# EAGLE board rele_II (EAGLE 4.01)
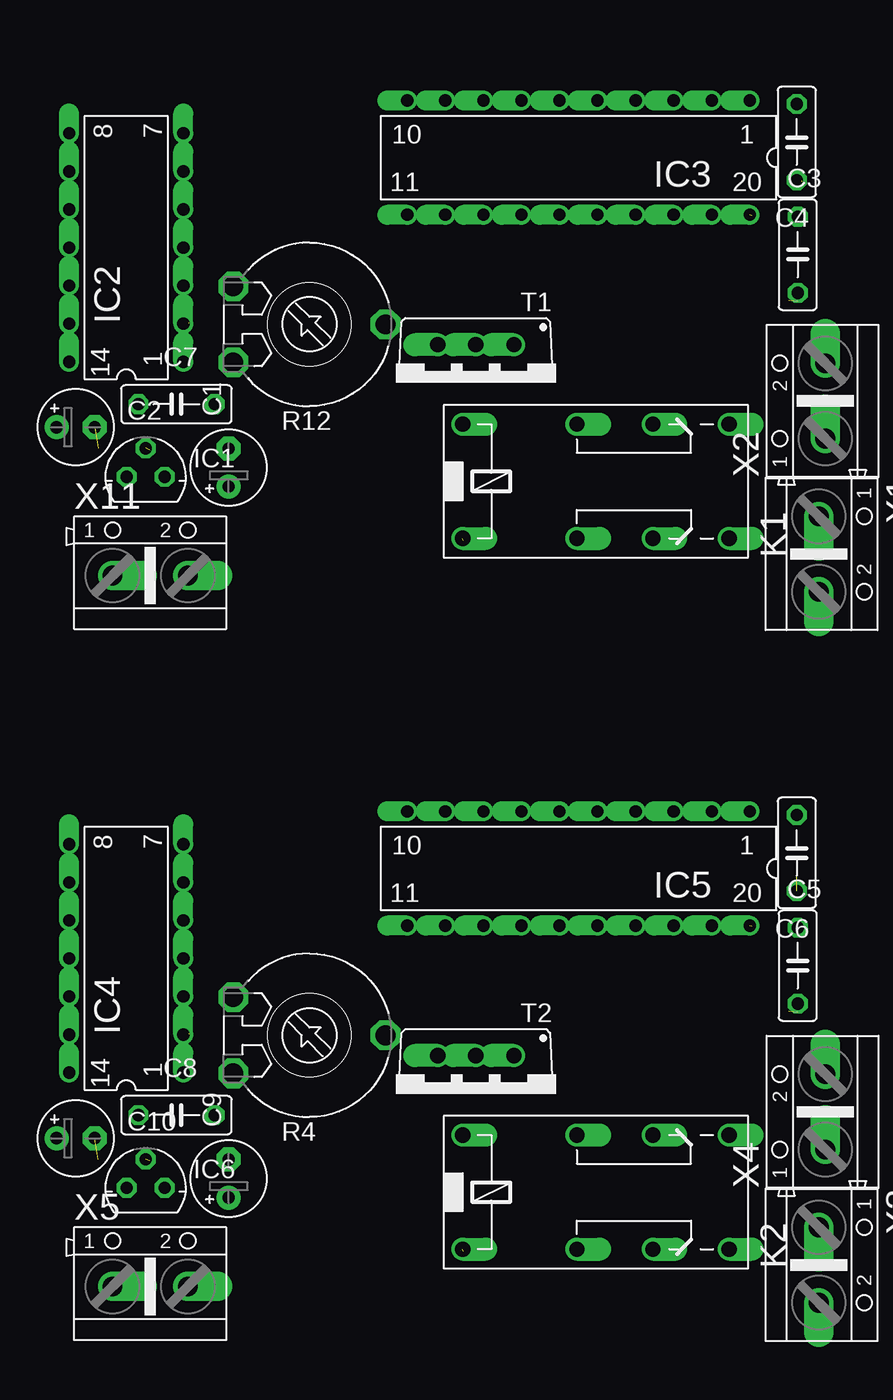
[diagram p0: board, top side]
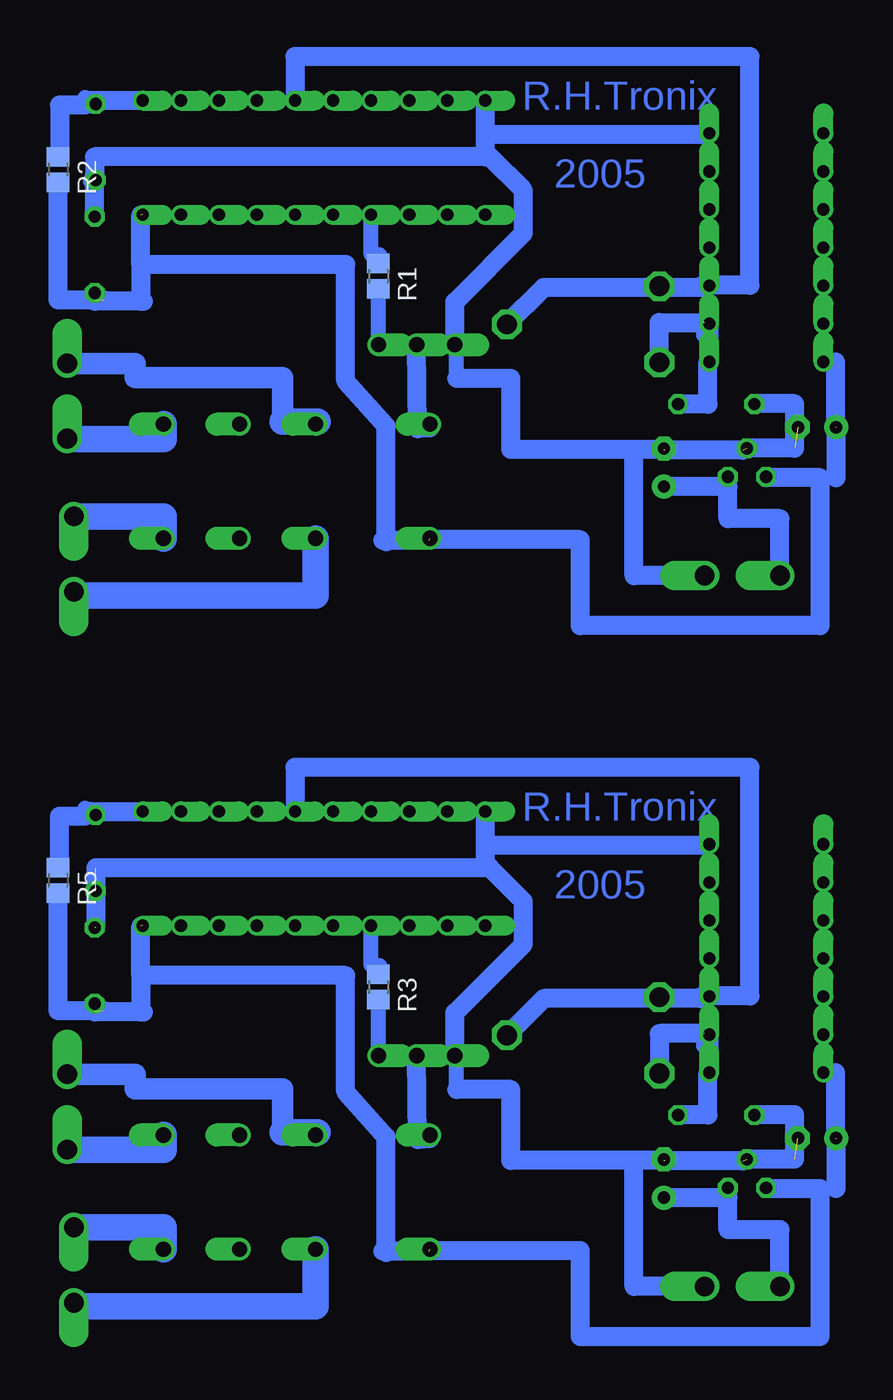
[diagram p1: board, bottom side, seen from below]

No outline drawn. Coordinates in mm, seen from the top.
Copper layers used: Bottom

## Footprints (pad centres in the part's own frame; a part is rotated, then mirrored left to right if it is on the bottom)
E2,5-5 = drill 0.813 pad 1.6 round: + -1.27,0 | drill 0.813 pad 1.6 octagon: - 1.27,0
C050-025X075 = drill 0.813 octagon: 1 -2.54,0; 2 2.54,0
78LXX = drill 0.813 octagon: GND 0,1.905; IN 1.27,0; OUT -1.27,0
DIL14 = drill 0.813 offset: 1 -7.62,-3.81; 2 -5.08,-3.81; 3 -2.54,-3.81; 4 0,-3.81; 5 2.54,-3.81; 6 5.08,-3.81; 7 7.62,-3.81; 8 7.62,3.81; 9 5.08,3.81; 10 2.54,3.81; 11 0,3.81; 12 -2.54,3.81; 13 -5.08,3.81; 14 -7.62,3.81
DIL20 = drill 0.813 offset: 1 -11.43,-3.81; 2 -8.89,-3.81; 3 -6.35,-3.81; 4 -3.81,-3.81; 5 -1.27,-3.81; 6 1.27,-3.81; 7 3.81,-3.81; 8 6.35,-3.81; 9 8.89,-3.81; 10 11.43,-3.81; 11 11.43,3.81; 12 8.89,3.81; 13 6.35,3.81; 14 3.81,3.81; 15 1.27,3.81; 16 -1.27,3.81; 17 -3.81,3.81; 18 -6.35,3.81; 19 -8.89,3.81; 20 -11.43,3.81
351 = drill 1.016 offset: 1 -3.81,-3.81; 16 -3.81,3.81; O1 8.89,-3.81; O2 8.89,3.81; P1 3.81,-3.81; P2 3.81,3.81; S1 13.97,-3.81; S2 13.97,3.81
R0805 = smd 1.3 x 1.5: 1 -0.85,0; 2 0.85,0
LI10 = drill 1.321 octagon: 1 -2.54,-5.08; 2 0,5.08; 3 2.54,-5.08
TO220V = drill 1.016 offset: 1 -2.54,-2.54; 2 0,-2.54; 3 2.54,-2.54
AK500/2 = drill 1.321 offset: 1 -2.515,0; 2 2.515,0

## Placement (x,y rotation side)
C1  [E2,5-5]  55.45,38.93 90 top
C2  [E2,5-5]  45.23,41.63 0 top
C3  100n  [C050-025X075]  93.42,53.14 90 top
C4  100n  [C050-025X075]  93.35,60.66 270 top
C5  100n  [C050-025X075]  93.42,5.71 90 top
C6  100n  [C050-025X075]  93.35,13.23 270 top
C7  1n  [C050-025X075]  51.96,43.17 0 top
C8  1n  [C050-025X075]  51.96,-4.26 0 top
C9  [E2,5-5]  55.45,-8.49 90 top
C10  [E2,5-5]  45.23,-5.8 0 top
IC1  [78LXX]  49.9,38.32 0 top
IC2  4093N  [DIL14]  48.61,53.62 90 top
IC3  AT90S1200P  [DIL20]  78.79,59.62 180 top
IC4  4093N  [DIL14]  48.61,6.19 90 top
IC5  AT90S1200P  [DIL20]  78.79,12.19 180 top
IC6  [78LXX]  49.9,-9.11 0 top
K1  351  [351]  74.87,38.02 0 top
K2  351  [351]  74.87,-9.4 0 top
R1  270R  [R0805]  74.49,51.71 270 bottom
R2  10k  [R0805]  95.87,58.83 270 bottom
R3  270R  [R0805]  74.49,4.28 270 bottom
R4  1M  [LI10]  60.83,1.07 270 top
R5  10k  [R0805]  95.87,11.4 270 bottom
R12  1M  [LI10]  60.83,48.5 270 top
T1  TIP122*  [TO220V]  71.94,44.6 180 top
T2  TIP122*  [TO220V]  71.94,-2.83 180 top
X1  [AK500/2]  94.82,33.17 270 top
X2  [AK500/2]  95.27,43.38 90 top
X3  [AK500/2]  94.82,-14.26 270 top
X4  [AK500/2]  95.27,-4.04 90 top
X5  [AK500/2]  50.21,-15.69 0 top
X11  [AK500/2]  50.21,31.73 0 top

## Library data of the parts
C1-C10 R1-R3 R5 = rcl
IC1 IC6 = v-reg
IC2 IC4 = 40xx
IC3 IC5 = atmel
K1 K2 = relay
R4 R12 = pot
T1 T2 = transistor-npn
X1-X5 X11 = con-ptr500

## Nets
GND: C1.- C2.- C3.2 C4.2 C7.1 IC1.GND IC2.7 IC3.10 T1.3 X11.2
GND1: C5.2 C6.2 C8.1 C9.- C10.- IC4.7 IC5.10 IC6.GND T2.3 X5.2
N$1: C2.+ C3.1 IC1.OUT IC2.14 IC3.20 K1.1 R2.2
N$2: C1.+ IC1.IN X11.1
N$3: C6.1 IC5.1 R5.1
N$4: R1.2 T1.1
N$5: K1.S2 X2.1
N$6: K1.P2 X2.2
N$7: K1.S1 X1.1
N$8: K1.P1 X1.2
N$9: K1.16 T1.2
N$10: C8.2 IC4.1 IC4.2 R4.3
N$11: IC4.3 IC5.5 R4.1 R4.2
N$12: IC5.14 R3.1
N$13: C5.1 C10.+ IC4.14 IC5.20 IC6.OUT K2.1 R5.2
N$14: R3.2 T2.1
N$15: K2.S2 X4.1
N$16: K2.P2 X4.2
N$17: K2.S1 X3.1
N$18: K2.P1 X3.2
N$19: K2.16 T2.2
N$20: C9.+ IC6.IN X5.1
N$40: C4.1 IC3.1 R2.1
N$41: C7.2 IC2.1 IC2.2 R12.3
N$42: IC2.3 IC3.5 R12.1 R12.2
N$47: IC3.14 R1.1

## Tracks (layer width: path | path; a pad name or v marks a point on that pad's centre or on a via)
GND  (4 unrouted)
  Bottom 0.406: 49.46,43.2 49.42,43.2 C7.1 | C1.- 55.45,40.1 55.45,40.15 | 57.44,39.97 55.38,39.97 55.38,40.15 | 67.31,61.2 67.27,61.2 67.27,61.24 | 52.42,61.2 IC2.7
  Bottom 1.016: 93.71,58.12 93.71,58.02 | 93.71,58.12 C4.2 | 93.42,58.6 93.71,58.12 | 93.42,58.03 93.68,58.03 | 67.27,59.67 67.27,59.64 | 67.27,59.67 67.36,59.67 67.11,59.67 67.08,59.69 | 67.27,59.67 67.27,61.24 | T1.3 69.28,47.14 69.28,44.88
  Bottom 1.27: C3.2 93.42,58.6 | IC3.10 67.36,59.67 93.44,59.67 93.42,58.03 | 69.28,44.88 65.66,44.88 65.66,40.15 55.45,40.15 | T1.3 69.4,49.99 64.82,54.57 64.82,57.43 67.08,59.69 | IC1.GND 46.73,40.23 46.73,43.2 49.42,43.2 | 50.18,40.1 55.45,40.1 | X11.2 57.44,31.73 57.44,39.97 | 67.27,61.2 52.42,61.2
GND1  (5 unrouted)
  Bottom 0.406: 49.46,-4.23 49.42,-4.23 C8.1 | C9.- 55.45,-7.33 55.45,-7.28 | 57.44,-7.46 55.38,-7.46 55.38,-7.28 | 67.31,13.77 67.27,13.77 67.27,13.81 | 52.42,13.77 IC4.7
  Bottom 1.016: 67.27,12.24 67.27,12.21 | 67.27,12.24 67.36,12.24 67.11,12.24 67.08,12.27 | 67.27,12.24 67.27,13.81 | T2.3 69.28,-0.29 69.28,-2.55
  Bottom 1.27: IC5.10 67.36,12.24 93.35,12.24 93.35,8.3 | 69.28,-2.55 65.66,-2.55 65.66,-7.28 55.45,-7.28 | T2.3 69.4,2.56 64.82,7.14 64.82,10.01 67.08,12.27 | IC6.GND 46.73,-7.2 46.73,-4.23 49.42,-4.23 | 50.18,-7.33 55.45,-7.33 | X5.2 57.44,-15.69 57.44,-7.46 | 67.27,13.77 52.42,13.77
N$1  (4 unrouted)
  Bottom 0.406: 48.63,38.26 48.65,38.26 | 48.63,38.26 IC1.OUT | 48.63,38.26 43.96,38.26 | 43.99,46 IC2.14 | 70.94,34.21 K1.1
  Bottom 1.016: 74.19,34.09 73.97,33.98
  Bottom 1.27: 90.36,52.48 90.36,55.78 | 90.36,52.48 76.68,52.48 76.68,44.72 73.97,41.69 73.97,33.98 | 71.11,34.09 74.19,34.09 | 43.96,38.26 C2.+ | 43.99,41.63 43.99,46 | 48.63,38.26 45.02,38.26 45.02,28.39 61.03,28.39 61.03,34.13 70.94,34.13 70.94,34.21 70.94,34.23 | 90.36,50.04 90.19,50.04 | 90.36,52.48 90.36,50.04 | C3.1 93.42,50.04 90.36,50.04 | R2.2 95.87,50.13 92.83,50.13
N$2
  Bottom 0.406: IC1.IN 51.17,37.66 51.17,38.13 51.12,38.13
  Bottom 1.27: 51.17,37.66 C1.+ | X11.1 47.7,35.53 51.17,35.53 51.17,38.13
N$3
  Bottom 1.016: 94.08,15.7 94.08,15.77 | 94.08,15.77 C6.1 93.76,15.77 | 94.08,15.77 94.08,16.21 | 93.76,15.77 93.76,15.64 | 93.76,15.77 93.76,16
  Bottom 1.27: 93.76,16 IC5.1 | R5.1 95.78,12.25 95.78,15.7 94.08,15.7
N$4
  Bottom 1.016: 74.48,47.18 T1.1 | 74.48,47.18 R1.2 | 74.48,47.18 74.54,47.18
N$5
  Bottom 1.016: 95.27,40.84 X2.1
  Bottom 1.778: K1.S2 88.84,40.84 95.27,40.84
N$6
  Bottom 1.016: K1.P2 78.55,41.83 78.55,42.01
  Bottom 1.422: 80.89,42.01 80.89,44.93 90.74,44.93 90.74,45.87 95.27,45.87 | 95.27,45.87 95.4,45.87 | 95.27,45.87 X2.2
  Bottom 1.778: 78.55,42.01 80.89,42.01
N$7
  Bottom 1.016: 94.93,35.68 X1.1
  Bottom 1.778: K1.S1 88.84,35.68 X1.1
N$8
  Bottom 1.016: 94.82,30.42 X1.2
  Bottom 1.778: K1.P1 78.68,30.42 94.82,30.42
N$9
  Bottom 1.016: K1.16 71.06,41.59
  Bottom 1.27: T1.2 71.89,41.53 71.06,41.59
N$10  (1 unrouted)
  Bottom 1.016: IC4.2 52.81,1.11 | IC4.1 52.51,-1.43 52.51,-1.34 | 52.81,1.11 52.81,1.17 | 52.81,1.11 52.81,0.34
  Bottom 1.27: IC4.1 IC4.2 | C8.2 52.51,-4.26 52.51,-1.43 | R4.3 55.75,1.19 52.76,1.19
N$11
  Bottom 1.016: 52.91,3.65 52.91,3.58 | 52.91,3.65 IC4.3 | 52.91,3.68 52.91,3.65 | 55.84,3.52 R4.1 55.77,3.59 55.77,3.52 | 52.91,3.65 53.04,3.52
  Bottom 1.27: IC5.5 80.06,18.94 49.7,18.94 49.7,3.68 52.91,3.68 | R4.2 63.46,3.52 55.84,3.52 | 53.04,3.52 55.77,3.52
N$12
  Bottom 1.016: 74.45,5.71 74.39,5.71 | R3.1 74.45,5.71 | IC5.14 74.98,5.71 74.45,5.71
N$13  (4 unrouted)
  Bottom 0.406: 48.63,-9.16 48.65,-9.16 | 48.63,-9.16 IC6.OUT | 48.63,-9.16 43.96,-9.16 | 43.99,-1.43 IC4.14 | 70.94,-13.21 K2.1
  Bottom 1.016: 74.19,-13.34 73.97,-13.45
  Bottom 1.27: 90.36,5.05 90.36,8.36 | 90.36,5.05 76.68,5.05 76.68,-2.7 73.97,-5.74 73.97,-13.45 | 71.11,-13.34 74.19,-13.34 | 43.96,-9.16 C10.+ | 43.99,-5.8 43.99,-1.43 | 48.63,-9.16 45.02,-9.16 45.02,-19.03 61.03,-19.03 61.03,-13.3 70.94,-13.3 70.94,-13.21 70.94,-13.2 | 90.36,2.61 90.19,2.61 | 90.36,5.05 90.36,2.61 | C5.1 93.42,2.61 90.36,2.61 | R5.2 95.87,2.7 92.83,2.7
N$14
  Bottom 1.016: 74.48,-0.24 T2.1 | 74.48,-0.24 R3.2 | 74.48,-0.24 74.54,-0.24
N$15
  Bottom 1.016: 95.27,-6.59 X4.1
  Bottom 1.778: K2.S2 88.84,-6.59 95.27,-6.59
N$16
  Bottom 1.016: K2.P2 78.55,-5.59 78.55,-5.42
  Bottom 1.422: 80.89,-5.42 80.89,-2.5 90.74,-2.5 90.74,-1.56 95.27,-1.56 | 95.27,-1.56 95.4,-1.56 | 95.27,-1.56 X4.2
  Bottom 1.778: 78.55,-5.42 80.89,-5.42
N$17
  Bottom 1.016: 94.93,-11.74 X3.1
  Bottom 1.778: K2.S1 88.84,-11.74 X3.1
N$18
  Bottom 1.016: 94.82,-17.01 X3.2
  Bottom 1.778: K2.P1 78.68,-17.01 94.82,-17.01
N$19
  Bottom 1.016: K2.16 71.06,-5.84
  Bottom 1.27: T2.2 71.89,-5.89 71.06,-5.84
N$20
  Bottom 0.406: IC6.IN 51.17,-9.76 51.17,-9.3 51.12,-9.3
  Bottom 1.27: 51.17,-9.76 C9.+ | X5.1 47.7,-11.9 51.17,-11.9 51.17,-9.3
N$40
  Bottom 1.016: 94.08,63.2 94.08,63.12 | 94.08,63.2 C4.1 93.76,63.2 | 94.08,63.2 94.08,63.64 | 93.76,63.2 93.76,63.07 | 93.76,63.43 93.76,63.2
  Bottom 1.27: IC3.1 93.76,63.43 | R2.1 95.78,59.68 95.78,63.12 94.08,63.12
N$41  (1 unrouted)
  Bottom 1.016: IC2.2 52.81,48.54 | IC2.1 52.51,46 52.51,46.09 | 52.81,48.54 52.81,48.59 | 52.81,48.54 52.81,47.77
  Bottom 1.27: IC2.1 IC2.2 | C7.2 52.51,43.17 52.51,46 | R12.3 55.75,48.62 52.76,48.62
N$42
  Bottom 1.016: 52.91,51.08 52.91,51 | 52.91,51.08 IC2.3 | 52.91,51.1 52.91,51.08 | 55.84,50.95 R12.1 55.77,51.01 55.77,50.95 | 52.91,51.08 53.04,50.95
  Bottom 1.27: IC3.5 80.06,66.37 49.7,66.37 49.7,51.1 52.91,51.1 | R12.2 63.46,50.95 55.84,50.95 | 53.04,50.95 55.77,50.95
N$47
  Bottom 1.016: 74.45,53.14 74.39,53.14 | R1.1 74.45,53.14 | IC3.14 74.98,53.14 74.45,53.14

## Text on the board
Bottom: R.H.Tronix | 2005 | R.H.Tronix | 2005